# Altium PCB 1_ir-tara-f.PcbDoc (part 1 of 8)
Units mm, origin at the board's own origin, x right, y up, seen from the top; angles counter-clockwise.
Board outline 151 x 86.38 mm, 2 copper layers (Top Layer, Bottom Layer); 728 components, 20 nets, 2100 pads, 0 vias.
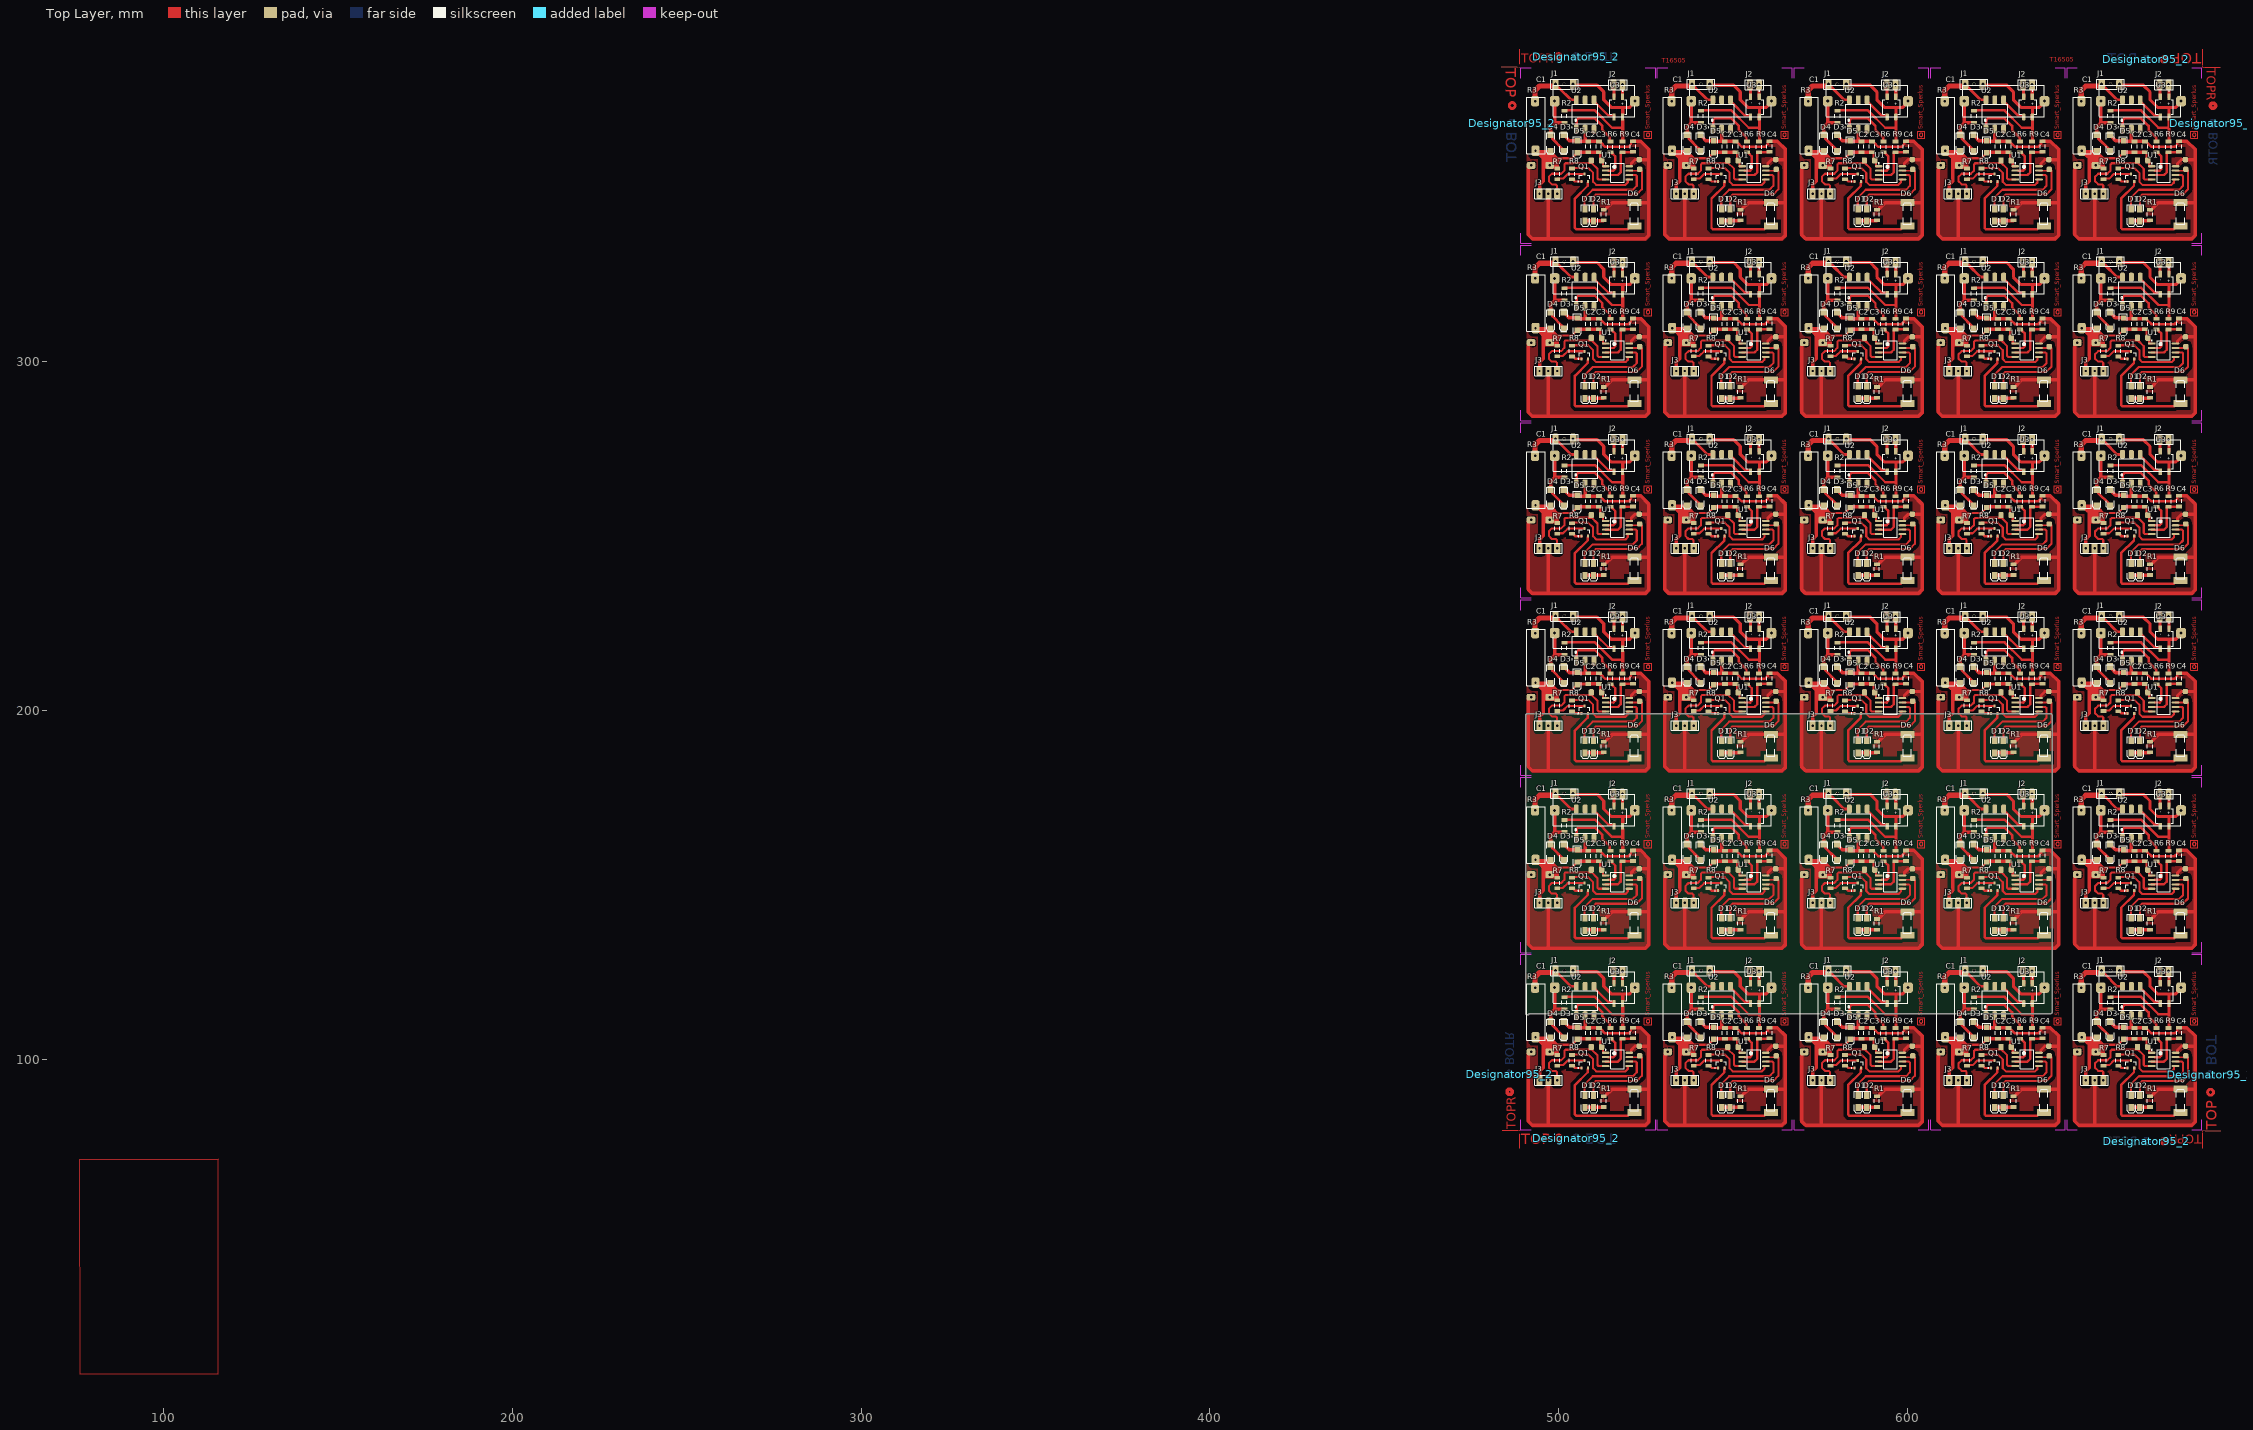
[diagram p0: Top Layer view]
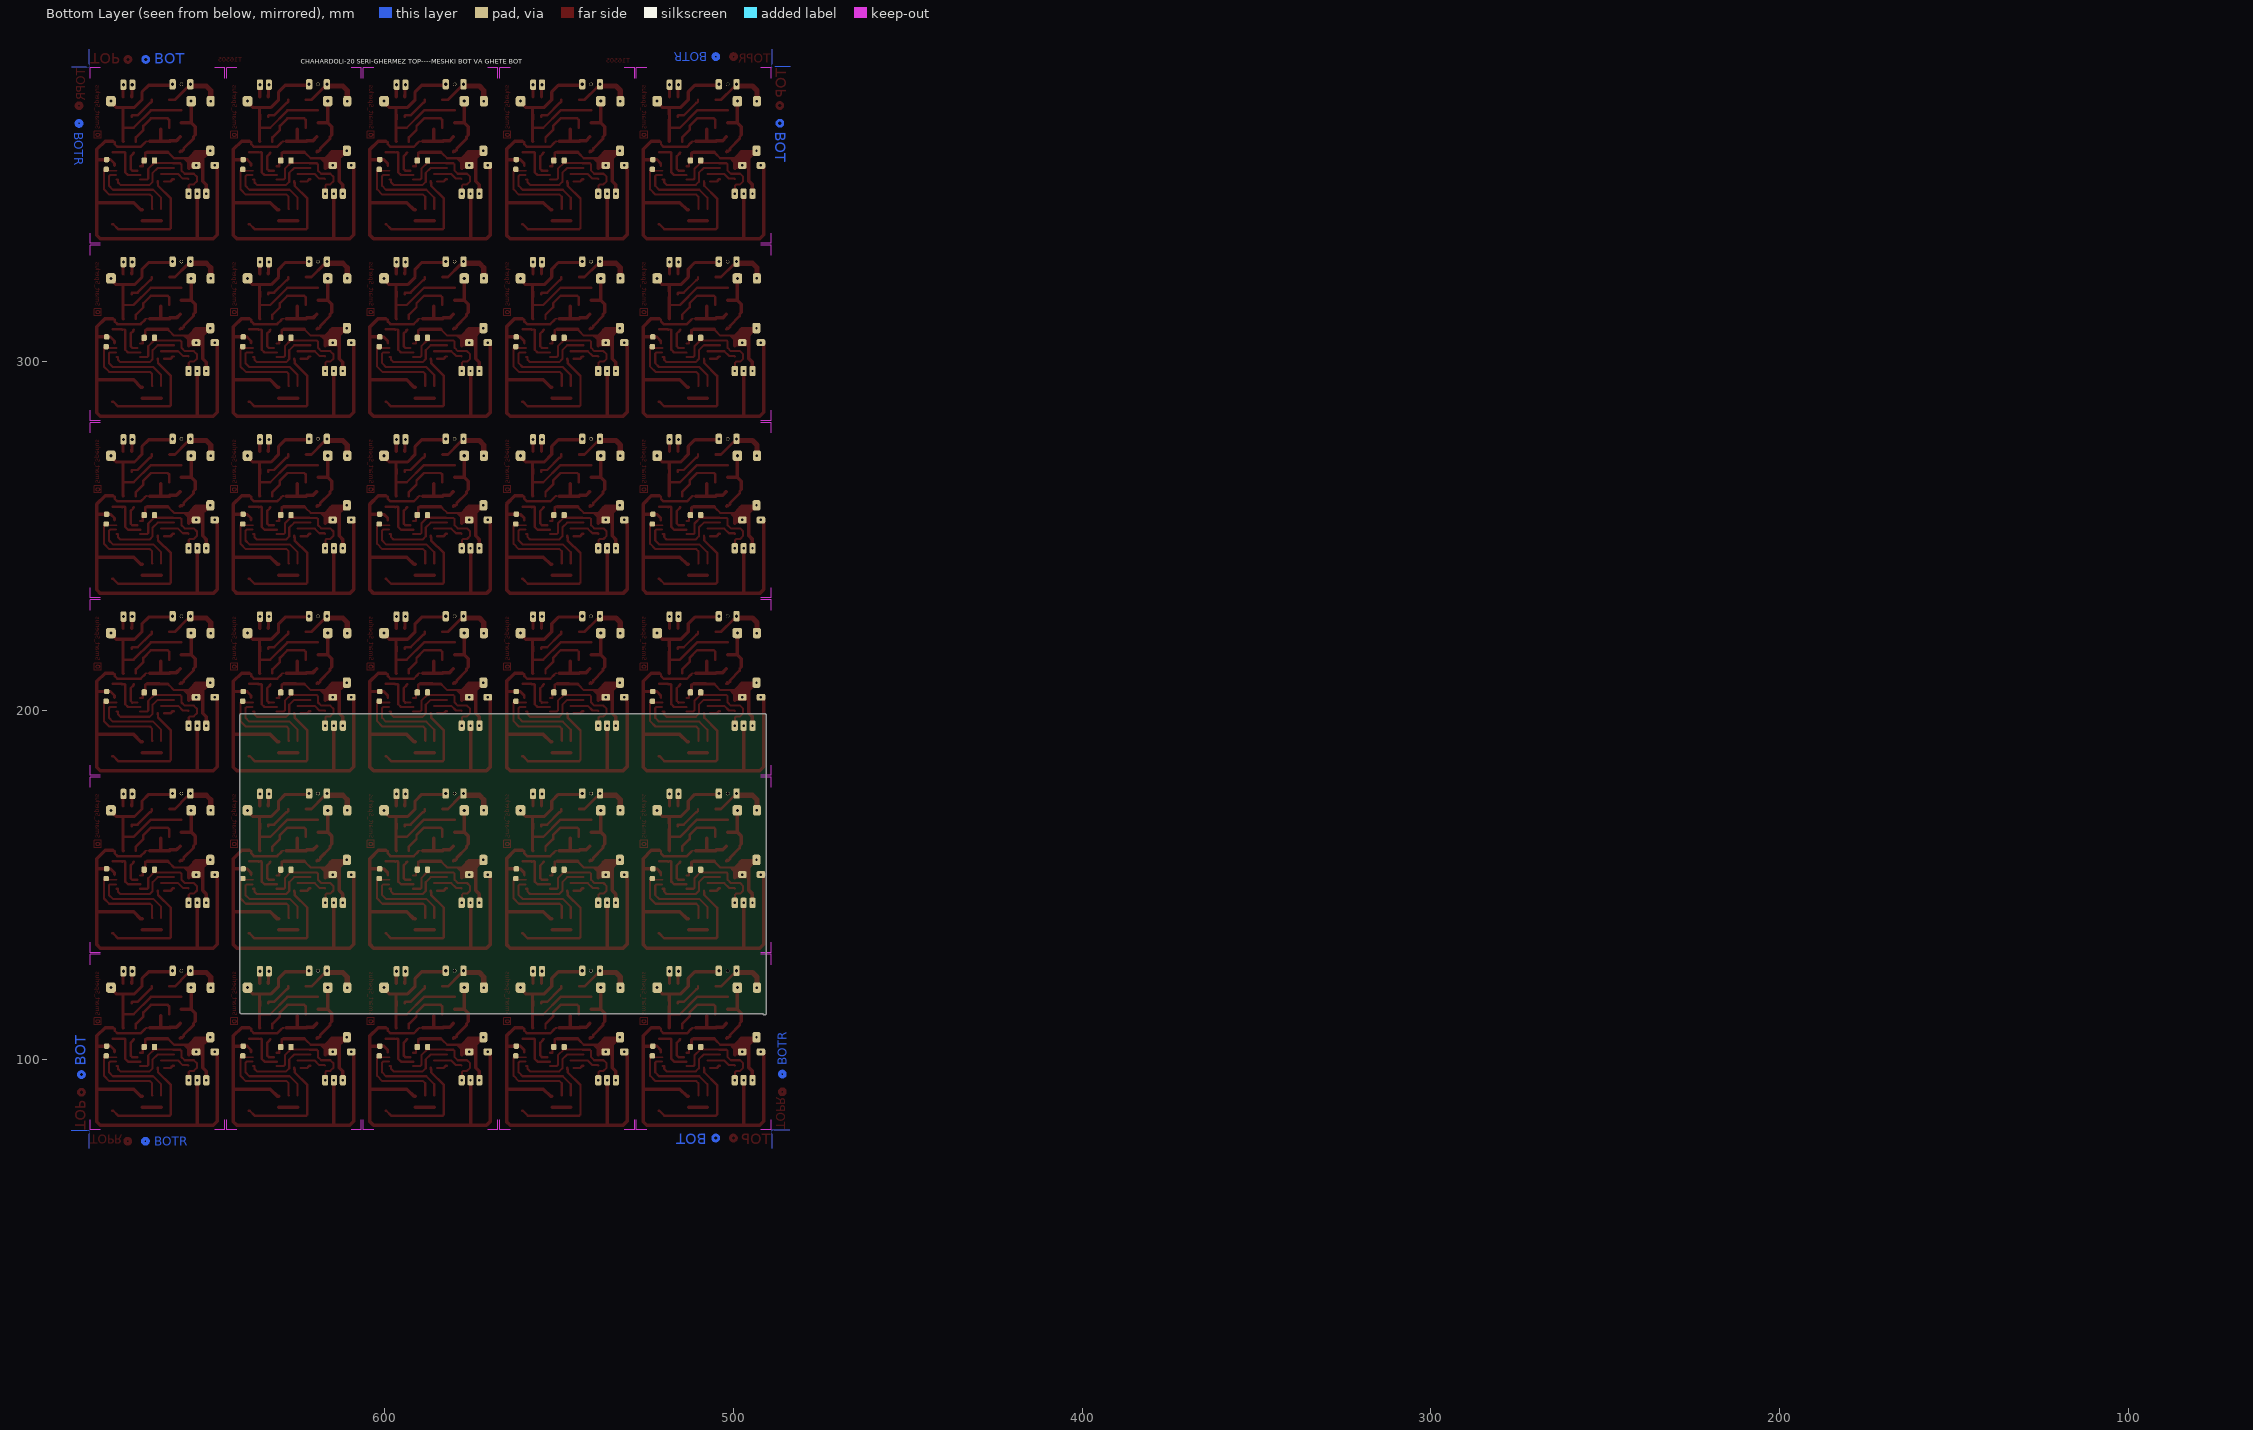
[diagram p1: Bottom Layer view, seen from below]

## Layer stack, top to bottom
Top Layer: signal copper 0.0356
Dielectric: dielectric 0.32, FR-4, Dk 4.8
Bottom Layer: signal copper 0.0356

## Board outline
490.528,113.26 490.528,198.641 cw(c491.028,198.641) 491.028,199.142 641.028,199.142 cw(c641.028,198.641) 641.528,198.641 641.528,113.641 cw(c641.028,113.641) 641.028,113.141 491.514,113.141 cw(c491.028,113.26)

## Design rules (kind name [scope] priority, off if disabled: settings)
Clearance Clearance_1 [InPolygon] p1: gap=1
Clearance [All] p2: gap=0.6
ComponentClearance [All] p1: gap=0.254 collisioncheckmode=3 verticalgap=0.254
PolygonConnect [All] p1: connectstyle=Relief reliefconductorwidth=0.254 reliefentries=4 polygonreliefangle="90 Angle"
RoutingLayers [All] p1: top layer_v5=FALSE bottom layer_v5=TRUE
RoutingVias [All] p1: holewidth=0.711 width=2.5 viastyle="Through Hole" minholewidth=0.711 minwidth=1.27 maxholewidth=0.711 maxwidth=2
SolderMaskExpansion [All] p1: expansion=0.102
TestPointUsage FabricationTestPointUsage [All] p1: valid=0 allowmultiple=FALSE
Testpoint FabricationTestpoint [All] p1: side=3 testpointundercomponent=TRUE minsize=1.016 maxsize=2.54 preferedsize=1.524 minholesize=0 maxholesize=1.016 preferedholesize=0.813 testpointgrid=0.025 style=297 order=0123456789
Width [All] p1: maxlimit=3 minlimit=0.5 preferedwidth=1
17 further rules are at their usual default settings.

## Classes and differential pairs
component class ir-kh: C1 C2 C3 C4 D1 D2 D3 D4 D5 D6 D21 D22 D23 J1 J2 J3 J5 J8 JP? P5 P7 Q1 R1 R2 R6 R7 R8 R9 R22 U1 U2 U3 U17

## Components (designator, comment, footprint, x,y, rotation, side; value= is the part's Value field where it differs from the comment)
C1 "1uf 400v" "1uf 400v" 600.756,379.353 r180 top
C1 "1uf 400v" "1uf 400v" 639.911,379.353 r180 top
C1 "1uf 400v" "1uf 400v" 561.601,379.353 r180 top
C1 "1uf 400v" "1uf 400v" 522.447,379.353 r180 top
C1 "1uf 400v" "1uf 400v" 679.065,379.353 r180 top
C1 "1uf 400v" "1uf 400v" 600.756,328.514 r180 top
C1 "1uf 400v" "1uf 400v" 639.911,328.514 r180 top
C1 "1uf 400v" "1uf 400v" 561.601,328.514 r180 top
C1 "1uf 400v" "1uf 400v" 522.447,328.514 r180 top
C1 "1uf 400v" "1uf 400v" 679.065,328.514 r180 top
C1 "1uf 400v" "1uf 400v" 600.756,277.676 r180 top
C1 "1uf 400v" "1uf 400v" 639.911,277.676 r180 top
C1 "1uf 400v" "1uf 400v" 561.601,277.676 r180 top
C1 "1uf 400v" "1uf 400v" 522.447,277.676 r180 top
C1 "1uf 400v" "1uf 400v" 679.065,277.676 r180 top
C1 "1uf 400v" "1uf 400v" 600.756,125.16 r180 top
C1 "1uf 400v" "1uf 400v" 639.911,125.16 r180 top
C1 "1uf 400v" "1uf 400v" 561.601,125.16 r180 top
C1 "1uf 400v" "1uf 400v" 522.447,125.16 r180 top
C1 "1uf 400v" "1uf 400v" 679.065,125.16 r180 top
C1 "1uf 400v" "1uf 400v" 600.756,226.837 r180 top
C1 "1uf 400v" "1uf 400v" 639.911,226.837 r180 top
C1 "1uf 400v" "1uf 400v" 561.601,226.837 r180 top
C1 "1uf 400v" "1uf 400v" 522.447,226.837 r180 top
C1 "1uf 400v" "1uf 400v" 679.065,226.837 r180 top
C1 "1uf 400v" "1uf 400v" 679.065,175.998 r180 top
C1 "1uf 400v" "1uf 400v" 522.447,175.998 r180 top
C1 "1uf 400v" "1uf 400v" 561.601,175.998 r180 top
C1 "1uf 400v" "1uf 400v" 639.911,175.998 r180 top
C1 "1uf 400v" "1uf 400v" 600.756,175.998 r180 top
C2 "=Value" "CAP 1206"#1 586.786,361.7 r90 top
C2 "=Value" "CAP 1206"#1 625.941,361.7 r90 top
C2 "=Value" "CAP 1206"#1 547.631,361.7 r90 top
C2 "=Value" "CAP 1206"#1 508.477,361.7 r90 top
C2 "=Value" "CAP 1206"#1 665.095,361.7 r90 top
C2 "=Value" "CAP 1206"#1 586.786,310.861 r90 top
C2 "=Value" "CAP 1206"#1 625.941,310.861 r90 top
C2 "=Value" "CAP 1206"#1 547.631,310.861 r90 top
C2 "=Value" "CAP 1206"#1 508.477,310.861 r90 top
C2 "=Value" "CAP 1206"#1 665.095,310.861 r90 top
C2 "=Value" "CAP 1206"#1 586.786,260.023 r90 top
C2 "=Value" "CAP 1206"#1 625.941,260.023 r90 top
C2 "=Value" "CAP 1206"#1 547.631,260.023 r90 top
C2 "=Value" "CAP 1206"#1 508.477,260.023 r90 top
C2 "=Value" "CAP 1206"#1 665.095,260.023 r90 top
C2 "=Value" "CAP 1206"#1 586.786,107.507 r90 top
C2 "=Value" "CAP 1206"#1 625.941,107.507 r90 top
C2 "=Value" "CAP 1206"#1 547.631,107.507 r90 top
C2 "=Value" "CAP 1206"#1 508.477,107.507 r90 top
C2 "=Value" "CAP 1206"#1 665.095,107.507 r90 top
C2 "=Value" "CAP 1206"#1 586.786,209.184 r90 top
C2 "=Value" "CAP 1206"#1 625.941,209.184 r90 top
C2 "=Value" "CAP 1206"#1 547.631,209.184 r90 top
C2 "=Value" "CAP 1206"#1 508.477,209.184 r90 top
C2 "=Value" "CAP 1206"#1 665.095,209.184 r90 top
C2 "=Value" "CAP 1206"#1 665.095,158.345 r90 top
C2 "=Value" "CAP 1206"#1 508.477,158.345 r90 top
C2 "=Value" "CAP 1206"#1 547.631,158.345 r90 top
C2 "=Value" "CAP 1206"#1 625.941,158.345 r90 top
C2 "=Value" "CAP 1206"#1 586.786,158.345 r90 top
C3 "=Value" "CAP 1206"#1 589.834,361.7 r90 top
C3 "=Value" "CAP 1206"#1 628.989,361.7 r90 top
C3 "=Value" "CAP 1206"#1 550.679,361.7 r90 top
C3 "=Value" "CAP 1206"#1 511.525,361.7 r90 top
C3 "=Value" "CAP 1206"#1 668.143,361.7 r90 top
C3 "=Value" "CAP 1206"#1 589.834,310.861 r90 top
C3 "=Value" "CAP 1206"#1 628.989,310.861 r90 top
C3 "=Value" "CAP 1206"#1 550.679,310.861 r90 top
C3 "=Value" "CAP 1206"#1 511.525,310.861 r90 top
C3 "=Value" "CAP 1206"#1 668.143,310.861 r90 top
C3 "=Value" "CAP 1206"#1 589.834,260.023 r90 top
C3 "=Value" "CAP 1206"#1 628.989,260.023 r90 top
C3 "=Value" "CAP 1206"#1 550.679,260.023 r90 top
C3 "=Value" "CAP 1206"#1 511.525,260.023 r90 top
C3 "=Value" "CAP 1206"#1 668.143,260.023 r90 top
C3 "=Value" "CAP 1206"#1 589.834,107.507 r90 top
C3 "=Value" "CAP 1206"#1 628.989,107.507 r90 top
C3 "=Value" "CAP 1206"#1 550.679,107.507 r90 top
C3 "=Value" "CAP 1206"#1 511.525,107.507 r90 top
C3 "=Value" "CAP 1206"#1 668.143,107.507 r90 top
C3 "=Value" "CAP 1206"#1 589.834,209.184 r90 top
C3 "=Value" "CAP 1206"#1 628.989,209.184 r90 top
C3 "=Value" "CAP 1206"#1 550.679,209.184 r90 top
C3 "=Value" "CAP 1206"#1 511.525,209.184 r90 top
C3 "=Value" "CAP 1206"#1 668.143,209.184 r90 top
C3 "=Value" "CAP 1206"#1 668.143,158.345 r90 top
C3 "=Value" "CAP 1206"#1 511.525,158.345 r90 top
C3 "=Value" "CAP 1206"#1 550.679,158.345 r90 top
C3 "=Value" "CAP 1206"#1 628.989,158.345 r90 top
C3 "=Value" "CAP 1206"#1 589.834,158.345 r90 top
C4 "=Value" "CAP 1206"#2 599.613,361.827 r270 top
C4 "=Value" "CAP 1206"#2 638.768,361.827 r270 top
C4 "=Value" "CAP 1206"#2 560.458,361.827 r270 top
C4 "=Value" "CAP 1206"#2 521.304,361.827 r270 top
C4 "=Value" "CAP 1206"#2 677.922,361.827 r270 top
C4 "=Value" "CAP 1206"#2 599.613,310.988 r270 top
C4 "=Value" "CAP 1206"#2 638.768,310.988 r270 top
C4 "=Value" "CAP 1206"#2 560.458,310.988 r270 top
C4 "=Value" "CAP 1206"#2 521.304,310.988 r270 top
C4 "=Value" "CAP 1206"#2 677.922,310.988 r270 top
C4 "=Value" "CAP 1206"#2 599.613,260.15 r270 top
C4 "=Value" "CAP 1206"#2 638.768,260.15 r270 top
C4 "=Value" "CAP 1206"#2 560.458,260.15 r270 top
C4 "=Value" "CAP 1206"#2 521.304,260.15 r270 top
C4 "=Value" "CAP 1206"#2 677.922,260.15 r270 top
C4 "=Value" "CAP 1206"#2 599.613,107.634 r270 top
C4 "=Value" "CAP 1206"#2 638.768,107.634 r270 top
C4 "=Value" "CAP 1206"#2 560.458,107.634 r270 top
C4 "=Value" "CAP 1206"#2 521.304,107.634 r270 top
C4 "=Value" "CAP 1206"#2 677.922,107.634 r270 top
C4 "=Value" "CAP 1206"#2 599.613,209.311 r270 top
C4 "=Value" "CAP 1206"#2 638.768,209.311 r270 top
C4 "=Value" "CAP 1206"#2 560.458,209.311 r270 top
C4 "=Value" "CAP 1206"#2 521.304,209.311 r270 top
C4 "=Value" "CAP 1206"#2 677.922,209.311 r270 top
C4 "=Value" "CAP 1206"#2 677.922,158.472 r270 top
C4 "=Value" "CAP 1206"#2 521.304,158.472 r270 top
C4 "=Value" "CAP 1206"#2 560.458,158.472 r270 top
C4 "=Value" "CAP 1206"#2 638.768,158.472 r270 top
C4 "=Value" "CAP 1206"#2 599.613,158.472 r270 top
D1 "LED2" 3.2X1.6X1.1#1 585.897,342.142 r270 top
D1 "LED2" 3.2X1.6X1.1#1 625.052,342.142 r270 top
D1 "LED2" 3.2X1.6X1.1#1 546.742,342.142 r270 top
D1 "LED2" 3.2X1.6X1.1#1 507.588,342.142 r270 top
D1 "LED2" 3.2X1.6X1.1#1 664.206,342.142 r270 top
D1 "LED2" 3.2X1.6X1.1#1 585.897,291.303 r270 top
D1 "LED2" 3.2X1.6X1.1#1 625.052,291.303 r270 top
D1 "LED2" 3.2X1.6X1.1#1 546.742,291.303 r270 top
D1 "LED2" 3.2X1.6X1.1#1 507.588,291.303 r270 top
D1 "LED2" 3.2X1.6X1.1#1 664.206,291.303 r270 top
D1 "LED2" 3.2X1.6X1.1#1 585.897,240.465 r270 top
D1 "LED2" 3.2X1.6X1.1#1 625.052,240.465 r270 top
D1 "LED2" 3.2X1.6X1.1#1 546.742,240.465 r270 top
D1 "LED2" 3.2X1.6X1.1#1 507.588,240.465 r270 top
D1 "LED2" 3.2X1.6X1.1#1 664.206,240.465 r270 top
D1 "LED2" 3.2X1.6X1.1#1 585.897,87.949 r270 top
D1 "LED2" 3.2X1.6X1.1#1 625.052,87.949 r270 top
D1 "LED2" 3.2X1.6X1.1#1 546.742,87.949 r270 top
D1 "LED2" 3.2X1.6X1.1#1 507.588,87.949 r270 top
D1 "LED2" 3.2X1.6X1.1#1 664.206,87.949 r270 top
D1 "LED2" 3.2X1.6X1.1#1 585.897,189.626 r270 top
D1 "LED2" 3.2X1.6X1.1#1 625.052,189.626 r270 top
D1 "LED2" 3.2X1.6X1.1#1 546.742,189.626 r270 top
D1 "LED2" 3.2X1.6X1.1#1 507.588,189.626 r270 top
D1 "LED2" 3.2X1.6X1.1#1 664.206,189.626 r270 top
D1 "LED2" 3.2X1.6X1.1#1 664.206,138.787 r270 top
D1 "LED2" 3.2X1.6X1.1#1 507.588,138.787 r270 top
D1 "LED2" 3.2X1.6X1.1#1 546.742,138.787 r270 top
D1 "LED2" 3.2X1.6X1.1#1 625.052,138.787 r270 top
D1 "LED2" 3.2X1.6X1.1#1 585.897,138.787 r270 top
D2 "LED2" 3.2X1.6X1.1#1 588.31,342.142 r270 top
D2 "LED2" 3.2X1.6X1.1#1 627.465,342.142 r270 top
D2 "LED2" 3.2X1.6X1.1#1 549.155,342.142 r270 top
D2 "LED2" 3.2X1.6X1.1#1 510.001,342.142 r270 top
D2 "LED2" 3.2X1.6X1.1#1 666.619,342.142 r270 top
D2 "LED2" 3.2X1.6X1.1#1 588.31,291.303 r270 top
D2 "LED2" 3.2X1.6X1.1#1 627.465,291.303 r270 top
D2 "LED2" 3.2X1.6X1.1#1 549.155,291.303 r270 top
D2 "LED2" 3.2X1.6X1.1#1 510.001,291.303 r270 top
D2 "LED2" 3.2X1.6X1.1#1 666.619,291.303 r270 top
D2 "LED2" 3.2X1.6X1.1#1 588.31,240.465 r270 top
D2 "LED2" 3.2X1.6X1.1#1 627.465,240.465 r270 top
D2 "LED2" 3.2X1.6X1.1#1 549.155,240.465 r270 top
D2 "LED2" 3.2X1.6X1.1#1 510.001,240.465 r270 top
D2 "LED2" 3.2X1.6X1.1#1 666.619,240.465 r270 top
D2 "LED2" 3.2X1.6X1.1#1 588.31,87.949 r270 top
D2 "LED2" 3.2X1.6X1.1#1 627.465,87.949 r270 top
D2 "LED2" 3.2X1.6X1.1#1 549.155,87.949 r270 top
D2 "LED2" 3.2X1.6X1.1#1 510.001,87.949 r270 top
D2 "LED2" 3.2X1.6X1.1#1 666.619,87.949 r270 top
D2 "LED2" 3.2X1.6X1.1#1 588.31,189.626 r270 top
D2 "LED2" 3.2X1.6X1.1#1 627.465,189.626 r270 top
D2 "LED2" 3.2X1.6X1.1#1 549.155,189.626 r270 top
D2 "LED2" 3.2X1.6X1.1#1 510.001,189.626 r270 top
D2 "LED2" 3.2X1.6X1.1#1 666.619,189.626 r270 top
D2 "LED2" 3.2X1.6X1.1#1 666.619,138.787 r270 top
D2 "LED2" 3.2X1.6X1.1#1 510.001,138.787 r270 top
D2 "LED2" 3.2X1.6X1.1#1 549.155,138.787 r270 top
D2 "LED2" 3.2X1.6X1.1#1 627.465,138.787 r270 top
D2 "LED2" 3.2X1.6X1.1#1 588.31,138.787 r270 top
D3 "D Tunnel1" 3.2X1.6X1.1#2 579.801,362.843 r270 top
D3 "D Tunnel1" 3.2X1.6X1.1#2 618.956,362.843 r270 top
D3 "D Tunnel1" 3.2X1.6X1.1#2 540.646,362.843 r270 top
D3 "D Tunnel1" 3.2X1.6X1.1#2 501.492,362.843 r270 top
D3 "D Tunnel1" 3.2X1.6X1.1#2 658.11,362.843 r270 top
D3 "D Tunnel1" 3.2X1.6X1.1#2 579.801,312.004 r270 top
D3 "D Tunnel1" 3.2X1.6X1.1#2 618.956,312.004 r270 top
D3 "D Tunnel1" 3.2X1.6X1.1#2 540.646,312.004 r270 top
D3 "D Tunnel1" 3.2X1.6X1.1#2 501.492,312.004 r270 top
D3 "D Tunnel1" 3.2X1.6X1.1#2 658.11,312.004 r270 top
D3 "D Tunnel1" 3.2X1.6X1.1#2 579.801,261.166 r270 top
D3 "D Tunnel1" 3.2X1.6X1.1#2 618.956,261.166 r270 top
D3 "D Tunnel1" 3.2X1.6X1.1#2 540.646,261.166 r270 top
D3 "D Tunnel1" 3.2X1.6X1.1#2 501.492,261.166 r270 top
D3 "D Tunnel1" 3.2X1.6X1.1#2 658.11,261.166 r270 top
D3 "D Tunnel1" 3.2X1.6X1.1#2 579.801,108.65 r270 top
D3 "D Tunnel1" 3.2X1.6X1.1#2 618.956,108.65 r270 top
D3 "D Tunnel1" 3.2X1.6X1.1#2 540.646,108.65 r270 top
D3 "D Tunnel1" 3.2X1.6X1.1#2 501.492,108.65 r270 top
D3 "D Tunnel1" 3.2X1.6X1.1#2 658.11,108.65 r270 top
D3 "D Tunnel1" 3.2X1.6X1.1#2 579.801,210.327 r270 top
D3 "D Tunnel1" 3.2X1.6X1.1#2 618.956,210.327 r270 top
D3 "D Tunnel1" 3.2X1.6X1.1#2 540.646,210.327 r270 top
D3 "D Tunnel1" 3.2X1.6X1.1#2 501.492,210.327 r270 top
D3 "D Tunnel1" 3.2X1.6X1.1#2 658.11,210.327 r270 top
D3 "D Tunnel1" 3.2X1.6X1.1#2 658.11,159.488 r270 top
D3 "D Tunnel1" 3.2X1.6X1.1#2 501.492,159.488 r270 top
D3 "D Tunnel1" 3.2X1.6X1.1#2 540.646,159.488 r270 top
D3 "D Tunnel1" 3.2X1.6X1.1#2 618.956,159.488 r270 top
D3 "D Tunnel1" 3.2X1.6X1.1#2 579.801,159.488 r270 top
D4 "D Tunnel1" 3.2X1.6X1.1#2 575.991,362.843 r270 top
D4 "D Tunnel1" 3.2X1.6X1.1#2 615.146,362.843 r270 top
D4 "D Tunnel1" 3.2X1.6X1.1#2 536.836,362.843 r270 top
D4 "D Tunnel1" 3.2X1.6X1.1#2 497.682,362.843 r270 top
D4 "D Tunnel1" 3.2X1.6X1.1#2 654.3,362.843 r270 top
D4 "D Tunnel1" 3.2X1.6X1.1#2 575.991,312.004 r270 top
D4 "D Tunnel1" 3.2X1.6X1.1#2 615.146,312.004 r270 top
D4 "D Tunnel1" 3.2X1.6X1.1#2 536.836,312.004 r270 top
D4 "D Tunnel1" 3.2X1.6X1.1#2 497.682,312.004 r270 top
D4 "D Tunnel1" 3.2X1.6X1.1#2 654.3,312.004 r270 top
D4 "D Tunnel1" 3.2X1.6X1.1#2 575.991,261.166 r270 top
D4 "D Tunnel1" 3.2X1.6X1.1#2 615.146,261.166 r270 top
D4 "D Tunnel1" 3.2X1.6X1.1#2 536.836,261.166 r270 top
D4 "D Tunnel1" 3.2X1.6X1.1#2 497.682,261.166 r270 top
D4 "D Tunnel1" 3.2X1.6X1.1#2 654.3,261.166 r270 top
D4 "D Tunnel1" 3.2X1.6X1.1#2 575.991,108.65 r270 top
D4 "D Tunnel1" 3.2X1.6X1.1#2 615.146,108.65 r270 top
D4 "D Tunnel1" 3.2X1.6X1.1#2 536.836,108.65 r270 top
D4 "D Tunnel1" 3.2X1.6X1.1#2 497.682,108.65 r270 top
D4 "D Tunnel1" 3.2X1.6X1.1#2 654.3,108.65 r270 top
D4 "D Tunnel1" 3.2X1.6X1.1#2 575.991,210.327 r270 top
D4 "D Tunnel1" 3.2X1.6X1.1#2 615.146,210.327 r270 top
D4 "D Tunnel1" 3.2X1.6X1.1#2 536.836,210.327 r270 top
D4 "D Tunnel1" 3.2X1.6X1.1#2 497.682,210.327 r270 top
D4 "D Tunnel1" 3.2X1.6X1.1#2 654.3,210.327 r270 top
D4 "D Tunnel1" 3.2X1.6X1.1#2 654.3,159.488 r270 top
D4 "D Tunnel1" 3.2X1.6X1.1#2 497.682,159.488 r270 top
D4 "D Tunnel1" 3.2X1.6X1.1#2 536.836,159.488 r270 top
D4 "D Tunnel1" 3.2X1.6X1.1#2 615.146,159.488 r270 top
D4 "D Tunnel1" 3.2X1.6X1.1#2 575.991,159.488 r270 top
D5 "D Tunnel1" 3.2X1.6X1.1#3 583.611,361.7 r270 top
D5 "D Tunnel1" 3.2X1.6X1.1#3 622.766,361.7 r270 top
D5 "D Tunnel1" 3.2X1.6X1.1#3 544.456,361.7 r270 top
D5 "D Tunnel1" 3.2X1.6X1.1#3 505.302,361.7 r270 top
D5 "D Tunnel1" 3.2X1.6X1.1#3 661.92,361.7 r270 top
D5 "D Tunnel1" 3.2X1.6X1.1#3 583.611,310.861 r270 top
D5 "D Tunnel1" 3.2X1.6X1.1#3 622.766,310.861 r270 top
D5 "D Tunnel1" 3.2X1.6X1.1#3 544.456,310.861 r270 top
D5 "D Tunnel1" 3.2X1.6X1.1#3 505.302,310.861 r270 top
D5 "D Tunnel1" 3.2X1.6X1.1#3 661.92,310.861 r270 top
D5 "D Tunnel1" 3.2X1.6X1.1#3 583.611,260.023 r270 top
D5 "D Tunnel1" 3.2X1.6X1.1#3 622.766,260.023 r270 top
D5 "D Tunnel1" 3.2X1.6X1.1#3 544.456,260.023 r270 top
D5 "D Tunnel1" 3.2X1.6X1.1#3 505.302,260.023 r270 top
D5 "D Tunnel1" 3.2X1.6X1.1#3 661.92,260.023 r270 top
D5 "D Tunnel1" 3.2X1.6X1.1#3 583.611,107.507 r270 top
D5 "D Tunnel1" 3.2X1.6X1.1#3 622.766,107.507 r270 top
D5 "D Tunnel1" 3.2X1.6X1.1#3 544.456,107.507 r270 top
D5 "D Tunnel1" 3.2X1.6X1.1#3 505.302,107.507 r270 top
D5 "D Tunnel1" 3.2X1.6X1.1#3 661.92,107.507 r270 top
D5 "D Tunnel1" 3.2X1.6X1.1#3 583.611,209.184 r270 top
D5 "D Tunnel1" 3.2X1.6X1.1#3 622.766,209.184 r270 top
D5 "D Tunnel1" 3.2X1.6X1.1#3 544.456,209.184 r270 top
D5 "D Tunnel1" 3.2X1.6X1.1#3 505.302,209.184 r270 top
D5 "D Tunnel1" 3.2X1.6X1.1#3 661.92,209.184 r270 top
D5 "D Tunnel1" 3.2X1.6X1.1#3 661.92,158.345 r270 top
D5 "D Tunnel1" 3.2X1.6X1.1#3 505.302,158.345 r270 top
D5 "D Tunnel1" 3.2X1.6X1.1#3 544.456,158.345 r270 top
D5 "D Tunnel1" 3.2X1.6X1.1#3 622.766,158.345 r270 top
D5 "D Tunnel1" 3.2X1.6X1.1#3 583.611,158.345 r270 top
D6 "LED2" 3.2X1.6X1.1#4 599.994,342.396 r90 top
D6 "LED2" 3.2X1.6X1.1#4 639.149,342.396 r90 top
D6 "LED2" 3.2X1.6X1.1#4 560.839,342.396 r90 top
D6 "LED2" 3.2X1.6X1.1#4 521.685,342.396 r90 top
D6 "LED2" 3.2X1.6X1.1#4 678.303,342.396 r90 top
D6 "LED2" 3.2X1.6X1.1#4 599.994,291.557 r90 top
D6 "LED2" 3.2X1.6X1.1#4 639.149,291.557 r90 top
D6 "LED2" 3.2X1.6X1.1#4 560.839,291.557 r90 top
D6 "LED2" 3.2X1.6X1.1#4 521.685,291.557 r90 top
D6 "LED2" 3.2X1.6X1.1#4 678.303,291.557 r90 top
D6 "LED2" 3.2X1.6X1.1#4 599.994,240.719 r90 top
D6 "LED2" 3.2X1.6X1.1#4 639.149,240.719 r90 top
D6 "LED2" 3.2X1.6X1.1#4 560.839,240.719 r90 top
D6 "LED2" 3.2X1.6X1.1#4 521.685,240.719 r90 top
D6 "LED2" 3.2X1.6X1.1#4 678.303,240.719 r90 top
D6 "LED2" 3.2X1.6X1.1#4 599.994,88.203 r90 top
D6 "LED2" 3.2X1.6X1.1#4 639.149,88.203 r90 top
D6 "LED2" 3.2X1.6X1.1#4 560.839,88.203 r90 top
D6 "LED2" 3.2X1.6X1.1#4 521.685,88.203 r90 top
D6 "LED2" 3.2X1.6X1.1#4 678.303,88.203 r90 top
D6 "LED2" 3.2X1.6X1.1#4 599.994,189.88 r90 top
D6 "LED2" 3.2X1.6X1.1#4 639.149,189.88 r90 top
D6 "LED2" 3.2X1.6X1.1#4 560.839,189.88 r90 top
D6 "LED2" 3.2X1.6X1.1#4 521.685,189.88 r90 top
D6 "LED2" 3.2X1.6X1.1#4 678.303,189.88 r90 top
D6 "LED2" 3.2X1.6X1.1#4 678.303,139.041 r90 top
D6 "LED2" 3.2X1.6X1.1#4 521.685,139.041 r90 top
D6 "LED2" 3.2X1.6X1.1#4 560.839,139.041 r90 top
D6 "LED2" 3.2X1.6X1.1#4 639.149,139.041 r90 top
D6 "LED2" 3.2X1.6X1.1#4 599.994,139.041 r90 top
Designator95_2 "Comment" PAD 505.012,387.549 r270 top
Designator95_2 "Comment" PAD 486.667,368.438 r180 top
Designator95_2 "Comment" PAD 687.621,368.388 r180 top
Designator95_2 "Comment" PAD 668.51,386.733 r90 top
Designator95_2 "Comment" PAD 668.574,76.553 r90 top
Designator95_2 "Comment" PAD 686.919,95.664 r0 top
Designator95_2 "Comment" PAD 485.943,95.805 r0 top
Designator95_2 "Comment" PAD 505.054,77.46 r270 top
J1 "Header3X1" "HEADER 3X1"#1 577.388,379.607 r0 top
J1 "Header3X1" "HEADER 3X1"#1 616.543,379.607 r0 top
J1 "Header3X1" "HEADER 3X1"#1 538.233,379.607 r0 top
J1 "Header3X1" "HEADER 3X1"#1 499.079,379.607 r0 top
J1 "Header3X1" "HEADER 3X1"#1 655.697,379.607 r0 top
J1 "Header3X1" "HEADER 3X1"#1 577.388,328.768 r0 top
J1 "Header3X1" "HEADER 3X1"#1 616.543,328.768 r0 top
J1 "Header3X1" "HEADER 3X1"#1 538.233,328.768 r0 top
J1 "Header3X1" "HEADER 3X1"#1 499.079,328.768 r0 top
J1 "Header3X1" "HEADER 3X1"#1 655.697,328.768 r0 top
J1 "Header3X1" "HEADER 3X1"#1 577.388,277.93 r0 top
J1 "Header3X1" "HEADER 3X1"#1 616.543,277.93 r0 top
J1 "Header3X1" "HEADER 3X1"#1 538.233,277.93 r0 top
J1 "Header3X1" "HEADER 3X1"#1 499.079,277.93 r0 top
J1 "Header3X1" "HEADER 3X1"#1 655.697,277.93 r0 top
J1 "Header3X1" "HEADER 3X1"#1 577.388,125.414 r0 top
J1 "Header3X1" "HEADER 3X1"#1 616.543,125.414 r0 top
J1 "Header3X1" "HEADER 3X1"#1 538.233,125.414 r0 top
J1 "Header3X1" "HEADER 3X1"#1 499.079,125.414 r0 top
J1 "Header3X1" "HEADER 3X1"#1 655.697,125.414 r0 top
J1 "Header3X1" "HEADER 3X1"#1 577.388,227.091 r0 top
J1 "Header3X1" "HEADER 3X1"#1 616.543,227.091 r0 top
J1 "Header3X1" "HEADER 3X1"#1 538.233,227.091 r0 top
J1 "Header3X1" "HEADER 3X1"#1 499.079,227.091 r0 top
J1 "Header3X1" "HEADER 3X1"#1 655.697,227.091 r0 top
J1 "Header3X1" "HEADER 3X1"#1 655.697,176.252 r0 top
J1 "Header3X1" "HEADER 3X1"#1 499.079,176.252 r0 top
J1 "Header3X1" "HEADER 3X1"#1 538.233,176.252 r0 top
J1 "Header3X1" "HEADER 3X1"#1 616.543,176.252 r0 top
J1 "Header3X1" "HEADER 3X1"#1 577.388,176.252 r0 top
J2 "Header2X1" "Header 2X1" 595.295,379.48 r0 top
J2 "Header2X1" "Header 2X1" 634.45,379.48 r0 top
J2 "Header2X1" "Header 2X1" 556.14,379.48 r0 top
J2 "Header2X1" "Header 2X1" 516.986,379.48 r0 top
J2 "Header2X1" "Header 2X1" 673.604,379.48 r0 top
J2 "Header2X1" "Header 2X1" 595.295,328.641 r0 top
J2 "Header2X1" "Header 2X1" 634.45,328.641 r0 top
J2 "Header2X1" "Header 2X1" 556.14,328.641 r0 top
J2 "Header2X1" "Header 2X1" 516.986,328.641 r0 top
J2 "Header2X1" "Header 2X1" 673.604,328.641 r0 top
J2 "Header2X1" "Header 2X1" 595.295,277.803 r0 top
J2 "Header2X1" "Header 2X1" 634.45,277.803 r0 top
J2 "Header2X1" "Header 2X1" 556.14,277.803 r0 top
J2 "Header2X1" "Header 2X1" 516.986,277.803 r0 top
J2 "Header2X1" "Header 2X1" 673.604,277.803 r0 top
J2 "Header2X1" "Header 2X1" 595.295,125.287 r0 top
J2 "Header2X1" "Header 2X1" 634.45,125.287 r0 top
J2 "Header2X1" "Header 2X1" 556.14,125.287 r0 top
J2 "Header2X1" "Header 2X1" 516.986,125.287 r0 top
J2 "Header2X1" "Header 2X1" 673.604,125.287 r0 top
J2 "Header2X1" "Header 2X1" 595.295,226.964 r0 top
J2 "Header2X1" "Header 2X1" 634.45,226.964 r0 top
J2 "Header2X1" "Header 2X1" 556.14,226.964 r0 top
J2 "Header2X1" "Header 2X1" 516.986,226.964 r0 top
J2 "Header2X1" "Header 2X1" 673.604,226.964 r0 top
J2 "Header2X1" "Header 2X1" 673.604,176.125 r0 top
J2 "Header2X1" "Header 2X1" 516.986,176.125 r0 top
J2 "Header2X1" "Header 2X1" 556.14,176.125 r0 top
J2 "Header2X1" "Header 2X1" 634.45,176.125 r0 top
J2 "Header2X1" "Header 2X1" 595.295,176.125 r0 top
J3 "Header3X1" "HEADER 3X1"#2 572.816,348.238 r0 top
J3 "Header3X1" "HEADER 3X1"#2 611.971,348.238 r0 top
J3 "Header3X1" "HEADER 3X1"#2 533.661,348.238 r0 top
J3 "Header3X1" "HEADER 3X1"#2 494.507,348.238 r0 top
J3 "Header3X1" "HEADER 3X1"#2 651.125,348.238 r0 top
J3 "Header3X1" "HEADER 3X1"#2 572.816,297.399 r0 top
J3 "Header3X1" "HEADER 3X1"#2 611.971,297.399 r0 top
J3 "Header3X1" "HEADER 3X1"#2 533.661,297.399 r0 top
J3 "Header3X1" "HEADER 3X1"#2 494.507,297.399 r0 top
J3 "Header3X1" "HEADER 3X1"#2 651.125,297.399 r0 top
J3 "Header3X1" "HEADER 3X1"#2 572.816,246.561 r0 top
J3 "Header3X1" "HEADER 3X1"#2 611.971,246.561 r0 top
J3 "Header3X1" "HEADER 3X1"#2 533.661,246.561 r0 top
J3 "Header3X1" "HEADER 3X1"#2 494.507,246.561 r0 top
J3 "Header3X1" "HEADER 3X1"#2 651.125,246.561 r0 top
J3 "Header3X1" "HEADER 3X1"#2 572.816,94.045 r0 top
J3 "Header3X1" "HEADER 3X1"#2 611.971,94.045 r0 top
J3 "Header3X1" "HEADER 3X1"#2 533.661,94.045 r0 top
J3 "Header3X1" "HEADER 3X1"#2 494.507,94.045 r0 top
J3 "Header3X1" "HEADER 3X1"#2 651.125,94.045 r0 top
J3 "Header3X1" "HEADER 3X1"#2 572.816,195.722 r0 top
J3 "Header3X1" "HEADER 3X1"#2 611.971,195.722 r0 top
J3 "Header3X1" "HEADER 3X1"#2 533.661,195.722 r0 top
J3 "Header3X1" "HEADER 3X1"#2 494.507,195.722 r0 top
J3 "Header3X1" "HEADER 3X1"#2 651.125,195.722 r0 top
J3 "Header3X1" "HEADER 3X1"#2 651.125,144.883 r0 top
J3 "Header3X1" "HEADER 3X1"#2 494.507,144.883 r0 top
J3 "Header3X1" "HEADER 3X1"#2 533.661,144.883 r0 top
J3 "Header3X1" "HEADER 3X1"#2 611.971,144.883 r0 top
J3 "Header3X1" "HEADER 3X1"#2 572.816,144.883 r0 top
Q1 "QNPN" SOT-23B_L 585.77,352.81 r90 top
Q1 "QNPN" SOT-23B_L 624.925,352.81 r90 top
Q1 "QNPN" SOT-23B_L 546.615,352.81 r90 top
Q1 "QNPN" SOT-23B_L 507.461,352.81 r90 top
Q1 "QNPN" SOT-23B_L 664.079,352.81 r90 top
Q1 "QNPN" SOT-23B_L 585.77,301.971 r90 top
Q1 "QNPN" SOT-23B_L 624.925,301.971 r90 top
Q1 "QNPN" SOT-23B_L 546.615,301.971 r90 top
Q1 "QNPN" SOT-23B_L 507.461,301.971 r90 top
Q1 "QNPN" SOT-23B_L 664.079,301.971 r90 top
Q1 "QNPN" SOT-23B_L 585.77,251.133 r90 top
Q1 "QNPN" SOT-23B_L 624.925,251.133 r90 top
Q1 "QNPN" SOT-23B_L 546.615,251.133 r90 top
Q1 "QNPN" SOT-23B_L 507.461,251.133 r90 top
Q1 "QNPN" SOT-23B_L 664.079,251.133 r90 top
Q1 "QNPN" SOT-23B_L 585.77,98.617 r90 top
Q1 "QNPN" SOT-23B_L 624.925,98.617 r90 top
Q1 "QNPN" SOT-23B_L 546.615,98.617 r90 top
Q1 "QNPN" SOT-23B_L 507.461,98.617 r90 top
Q1 "QNPN" SOT-23B_L 664.079,98.617 r90 top
Q1 "QNPN" SOT-23B_L 585.77,200.294 r90 top
Q1 "QNPN" SOT-23B_L 624.925,200.294 r90 top
Q1 "QNPN" SOT-23B_L 546.615,200.294 r90 top
Q1 "QNPN" SOT-23B_L 507.461,200.294 r90 top
Q1 "QNPN" SOT-23B_L 664.079,200.294 r90 top
Q1 "QNPN" SOT-23B_L 664.079,149.455 r90 top
Q1 "QNPN" SOT-23B_L 507.461,149.455 r90 top
Q1 "QNPN" SOT-23B_L 546.615,149.455 r90 top
Q1 "QNPN" SOT-23B_L 624.925,149.455 r90 top
Q1 "QNPN" SOT-23B_L 585.77,149.455 r90 top
R1 "10K" "RES 1206 (3216X08L)"#1 591.231,342.269 r90 top
R1 "10K" "RES 1206 (3216X08L)"#1 630.386,342.269 r90 top
R1 "10K" "RES 1206 (3216X08L)"#1 552.076,342.269 r90 top
R1 "10K" "RES 1206 (3216X08L)"#1 512.922,342.269 r90 top
R1 "10K" "RES 1206 (3216X08L)"#1 669.54,342.269 r90 top
R1 "10K" "RES 1206 (3216X08L)"#1 591.231,291.43 r90 top
R1 "10K" "RES 1206 (3216X08L)"#1 630.386,291.43 r90 top
R1 "10K" "RES 1206 (3216X08L)"#1 552.076,291.43 r90 top
R1 "10K" "RES 1206 (3216X08L)"#1 512.922,291.43 r90 top
R1 "10K" "RES 1206 (3216X08L)"#1 669.54,291.43 r90 top
R1 "10K" "RES 1206 (3216X08L)"#1 591.231,240.592 r90 top
R1 "10K" "RES 1206 (3216X08L)"#1 630.386,240.592 r90 top
R1 "10K" "RES 1206 (3216X08L)"#1 552.076,240.592 r90 top
R1 "10K" "RES 1206 (3216X08L)"#1 512.922,240.592 r90 top
R1 "10K" "RES 1206 (3216X08L)"#1 669.54,240.592 r90 top
R1 "10K" "RES 1206 (3216X08L)"#1 591.231,88.076 r90 top
R1 "10K" "RES 1206 (3216X08L)"#1 630.386,88.076 r90 top
R1 "10K" "RES 1206 (3216X08L)"#1 552.076,88.076 r90 top
R1 "10K" "RES 1206 (3216X08L)"#1 512.922,88.076 r90 top
R1 "10K" "RES 1206 (3216X08L)"#1 669.54,88.076 r90 top
R1 "10K" "RES 1206 (3216X08L)"#1 591.231,189.753 r90 top
R1 "10K" "RES 1206 (3216X08L)"#1 630.386,189.753 r90 top
R1 "10K" "RES 1206 (3216X08L)"#1 552.076,189.753 r90 top
R1 "10K" "RES 1206 (3216X08L)"#1 512.922,189.753 r90 top
R1 "10K" "RES 1206 (3216X08L)"#1 669.54,189.753 r90 top
R1 "10K" "RES 1206 (3216X08L)"#1 669.54,138.914 r90 top
R1 "10K" "RES 1206 (3216X08L)"#1 512.922,138.914 r90 top
R1 "10K" "RES 1206 (3216X08L)"#1 552.076,138.914 r90 top
R1 "10K" "RES 1206 (3216X08L)"#1 630.386,138.914 r90 top
R1 "10K" "RES 1206 (3216X08L)"#1 591.231,138.914 r90 top
R2 "10K" "RES 1206 (3216X08L)"#2 579.928,370.463 r270 top
R2 "10K" "RES 1206 (3216X08L)"#2 619.083,370.463 r270 top
R2 "10K" "RES 1206 (3216X08L)"#2 540.773,370.463 r270 top
R2 "10K" "RES 1206 (3216X08L)"#2 501.619,370.463 r270 top
R2 "10K" "RES 1206 (3216X08L)"#2 658.237,370.463 r270 top
R2 "10K" "RES 1206 (3216X08L)"#2 579.928,319.624 r270 top
R2 "10K" "RES 1206 (3216X08L)"#2 619.083,319.624 r270 top
R2 "10K" "RES 1206 (3216X08L)"#2 540.773,319.624 r270 top
R2 "10K" "RES 1206 (3216X08L)"#2 501.619,319.624 r270 top
R2 "10K" "RES 1206 (3216X08L)"#2 658.237,319.624 r270 top
R2 "10K" "RES 1206 (3216X08L)"#2 579.928,268.786 r270 top
R2 "10K" "RES 1206 (3216X08L)"#2 619.083,268.786 r270 top
R2 "10K" "RES 1206 (3216X08L)"#2 540.773,268.786 r270 top
R2 "10K" "RES 1206 (3216X08L)"#2 501.619,268.786 r270 top
R2 "10K" "RES 1206 (3216X08L)"#2 658.237,268.786 r270 top
R2 "10K" "RES 1206 (3216X08L)"#2 579.928,116.27 r270 top
R2 "10K" "RES 1206 (3216X08L)"#2 619.083,116.27 r270 top
R2 "10K" "RES 1206 (3216X08L)"#2 540.773,116.27 r270 top
R2 "10K" "RES 1206 (3216X08L)"#2 501.619,116.27 r270 top
R2 "10K" "RES 1206 (3216X08L)"#2 658.237,116.27 r270 top
R2 "10K" "RES 1206 (3216X08L)"#2 579.928,217.947 r270 top
R2 "10K" "RES 1206 (3216X08L)"#2 619.083,217.947 r270 top
R2 "10K" "RES 1206 (3216X08L)"#2 540.773,217.947 r270 top
R2 "10K" "RES 1206 (3216X08L)"#2 501.619,217.947 r270 top
R2 "10K" "RES 1206 (3216X08L)"#2 658.237,217.947 r270 top
R2 "10K" "RES 1206 (3216X08L)"#2 658.237,167.108 r270 top
R2 "10K" "RES 1206 (3216X08L)"#2 501.619,167.108 r270 top
R2 "10K" "RES 1206 (3216X08L)"#2 540.773,167.108 r270 top
R2 "10K" "RES 1206 (3216X08L)"#2 619.083,167.108 r270 top
R2 "10K" "RES 1206 (3216X08L)"#2 579.928,167.108 r270 top
R3 "10K" Res-(2/1) 571.8,377.067 r270 top
R3 "10K" Res-(2/1) 610.955,377.067 r270 top
R3 "10K" Res-(2/1) 532.645,377.067 r270 top
R3 "10K" Res-(2/1) 493.491,377.067 r270 top
R3 "10K" Res-(2/1) 650.109,377.067 r270 top
R3 "10K" Res-(2/1) 571.8,326.228 r270 top
R3 "10K" Res-(2/1) 610.955,326.228 r270 top
R3 "10K" Res-(2/1) 532.645,326.228 r270 top
R3 "10K" Res-(2/1) 493.491,326.228 r270 top
R3 "10K" Res-(2/1) 650.109,326.228 r270 top
R3 "10K" Res-(2/1) 571.8,275.39 r270 top
R3 "10K" Res-(2/1) 610.955,275.39 r270 top
R3 "10K" Res-(2/1) 532.645,275.39 r270 top
R3 "10K" Res-(2/1) 493.491,275.39 r270 top
R3 "10K" Res-(2/1) 650.109,275.39 r270 top
R3 "10K" Res-(2/1) 571.8,122.874 r270 top
R3 "10K" Res-(2/1) 610.955,122.874 r270 top
R3 "10K" Res-(2/1) 532.645,122.874 r270 top
R3 "10K" Res-(2/1) 493.491,122.874 r270 top
R3 "10K" Res-(2/1) 650.109,122.874 r270 top
R3 "10K" Res-(2/1) 571.8,224.551 r270 top
R3 "10K" Res-(2/1) 610.955,224.551 r270 top
R3 "10K" Res-(2/1) 532.645,224.551 r270 top
R3 "10K" Res-(2/1) 493.491,224.551 r270 top
R3 "10K" Res-(2/1) 650.109,224.551 r270 top
R3 "10K" Res-(2/1) 650.109,173.712 r270 top
R3 "10K" Res-(2/1) 493.491,173.712 r270 top
R3 "10K" Res-(2/1) 532.645,173.712 r270 top
R3 "10K" Res-(2/1) 610.955,173.712 r270 top
R3 "10K" Res-(2/1) 571.8,173.712 r270 top
R6 "10K" "RES 1206 (3216X08L)"#3 593.136,361.7 r270 top
R6 "10K" "RES 1206 (3216X08L)"#3 632.291,361.7 r270 top
R6 "10K" "RES 1206 (3216X08L)"#3 553.981,361.7 r270 top
R6 "10K" "RES 1206 (3216X08L)"#3 514.827,361.7 r270 top
R6 "10K" "RES 1206 (3216X08L)"#3 671.445,361.7 r270 top
R6 "10K" "RES 1206 (3216X08L)"#3 593.136,310.861 r270 top
R6 "10K" "RES 1206 (3216X08L)"#3 632.291,310.861 r270 top
R6 "10K" "RES 1206 (3216X08L)"#3 553.981,310.861 r270 top
R6 "10K" "RES 1206 (3216X08L)"#3 514.827,310.861 r270 top
R6 "10K" "RES 1206 (3216X08L)"#3 671.445,310.861 r270 top
R6 "10K" "RES 1206 (3216X08L)"#3 593.136,260.023 r270 top
R6 "10K" "RES 1206 (3216X08L)"#3 632.291,260.023 r270 top
R6 "10K" "RES 1206 (3216X08L)"#3 553.981,260.023 r270 top
R6 "10K" "RES 1206 (3216X08L)"#3 514.827,260.023 r270 top
R6 "10K" "RES 1206 (3216X08L)"#3 671.445,260.023 r270 top
R6 "10K" "RES 1206 (3216X08L)"#3 593.136,107.507 r270 top
R6 "10K" "RES 1206 (3216X08L)"#3 632.291,107.507 r270 top
R6 "10K" "RES 1206 (3216X08L)"#3 553.981,107.507 r270 top
R6 "10K" "RES 1206 (3216X08L)"#3 514.827,107.507 r270 top
R6 "10K" "RES 1206 (3216X08L)"#3 671.445,107.507 r270 top
R6 "10K" "RES 1206 (3216X08L)"#3 593.136,209.184 r270 top
R6 "10K" "RES 1206 (3216X08L)"#3 632.291,209.184 r270 top
R6 "10K" "RES 1206 (3216X08L)"#3 553.981,209.184 r270 top
R6 "10K" "RES 1206 (3216X08L)"#3 514.827,209.184 r270 top
R6 "10K" "RES 1206 (3216X08L)"#3 671.445,209.184 r270 top
R6 "10K" "RES 1206 (3216X08L)"#3 671.445,158.345 r270 top
R6 "10K" "RES 1206 (3216X08L)"#3 514.827,158.345 r270 top
R6 "10K" "RES 1206 (3216X08L)"#3 553.981,158.345 r270 top
R6 "10K" "RES 1206 (3216X08L)"#3 632.291,158.345 r270 top
R6 "10K" "RES 1206 (3216X08L)"#3 593.136,158.345 r270 top
R7 "10K" "RES 1206 (3216X08L)"#4 577.896,353.953 r90 top
R7 "10K" "RES 1206 (3216X08L)"#4 617.051,353.953 r90 top
R7 "10K" "RES 1206 (3216X08L)"#4 538.741,353.953 r90 top
R7 "10K" "RES 1206 (3216X08L)"#4 499.587,353.953 r90 top
R7 "10K" "RES 1206 (3216X08L)"#4 656.205,353.953 r90 top
R7 "10K" "RES 1206 (3216X08L)"#4 577.896,303.114 r90 top
R7 "10K" "RES 1206 (3216X08L)"#4 617.051,303.114 r90 top
R7 "10K" "RES 1206 (3216X08L)"#4 538.741,303.114 r90 top
R7 "10K" "RES 1206 (3216X08L)"#4 499.587,303.114 r90 top
R7 "10K" "RES 1206 (3216X08L)"#4 656.205,303.114 r90 top
R7 "10K" "RES 1206 (3216X08L)"#4 577.896,252.276 r90 top
R7 "10K" "RES 1206 (3216X08L)"#4 617.051,252.276 r90 top
R7 "10K" "RES 1206 (3216X08L)"#4 538.741,252.276 r90 top
R7 "10K" "RES 1206 (3216X08L)"#4 499.587,252.276 r90 top
R7 "10K" "RES 1206 (3216X08L)"#4 656.205,252.276 r90 top
R7 "10K" "RES 1206 (3216X08L)"#4 577.896,99.76 r90 top
R7 "10K" "RES 1206 (3216X08L)"#4 617.051,99.76 r90 top
R7 "10K" "RES 1206 (3216X08L)"#4 538.741,99.76 r90 top
R7 "10K" "RES 1206 (3216X08L)"#4 499.587,99.76 r90 top
R7 "10K" "RES 1206 (3216X08L)"#4 656.205,99.76 r90 top
R7 "10K" "RES 1206 (3216X08L)"#4 577.896,201.437 r90 top
R7 "10K" "RES 1206 (3216X08L)"#4 617.051,201.437 r90 top
R7 "10K" "RES 1206 (3216X08L)"#4 538.741,201.437 r90 top
R7 "10K" "RES 1206 (3216X08L)"#4 499.587,201.437 r90 top
R7 "10K" "RES 1206 (3216X08L)"#4 656.205,201.437 r90 top
R7 "10K" "RES 1206 (3216X08L)"#4 656.205,150.598 r90 top
R7 "10K" "RES 1206 (3216X08L)"#4 499.587,150.598 r90 top
R7 "10K" "RES 1206 (3216X08L)"#4 538.741,150.598 r90 top
R7 "10K" "RES 1206 (3216X08L)"#4 617.051,150.598 r90 top
R7 "10K" "RES 1206 (3216X08L)"#4 577.896,150.598 r90 top
R8 "10K" "RES 1206 (3216X08L)"#4 582.142,353.917 r270 top
R8 "10K" "RES 1206 (3216X08L)"#4 621.297,353.917 r270 top
R8 "10K" "RES 1206 (3216X08L)"#4 542.988,353.917 r270 top
R8 "10K" "RES 1206 (3216X08L)"#4 503.833,353.917 r270 top
R8 "10K" "RES 1206 (3216X08L)"#4 660.451,353.917 r270 top
R8 "10K" "RES 1206 (3216X08L)"#4 582.142,303.078 r270 top
R8 "10K" "RES 1206 (3216X08L)"#4 621.297,303.078 r270 top
R8 "10K" "RES 1206 (3216X08L)"#4 542.988,303.078 r270 top
R8 "10K" "RES 1206 (3216X08L)"#4 503.833,303.078 r270 top
R8 "10K" "RES 1206 (3216X08L)"#4 660.452,303.078 r270 top
R8 "10K" "RES 1206 (3216X08L)"#4 582.142,252.239 r270 top
R8 "10K" "RES 1206 (3216X08L)"#4 621.297,252.239 r270 top
R8 "10K" "RES 1206 (3216X08L)"#4 542.988,252.239 r270 top
R8 "10K" "RES 1206 (3216X08L)"#4 503.833,252.239 r270 top
R8 "10K" "RES 1206 (3216X08L)"#4 660.452,252.239 r270 top
R8 "10K" "RES 1206 (3216X08L)"#4 582.142,99.723 r270 top
R8 "10K" "RES 1206 (3216X08L)"#4 621.297,99.723 r270 top
R8 "10K" "RES 1206 (3216X08L)"#4 542.988,99.723 r270 top
R8 "10K" "RES 1206 (3216X08L)"#4 503.833,99.723 r270 top
R8 "10K" "RES 1206 (3216X08L)"#4 660.452,99.723 r270 top
R8 "10K" "RES 1206 (3216X08L)"#4 582.142,201.401 r270 top
R8 "10K" "RES 1206 (3216X08L)"#4 621.297,201.401 r270 top
R8 "10K" "RES 1206 (3216X08L)"#4 542.988,201.401 r270 top
R8 "10K" "RES 1206 (3216X08L)"#4 503.833,201.401 r270 top
R8 "10K" "RES 1206 (3216X08L)"#4 660.452,201.401 r270 top
R8 "10K" "RES 1206 (3216X08L)"#4 660.452,150.562 r270 top
R8 "10K" "RES 1206 (3216X08L)"#4 503.833,150.562 r270 top
R8 "10K" "RES 1206 (3216X08L)"#4 542.988,150.562 r270 top
R8 "10K" "RES 1206 (3216X08L)"#4 621.297,150.562 r270 top
R8 "10K" "RES 1206 (3216X08L)"#4 582.142,150.562 r270 top
R9 "10K" "RES 1206 (3216X08L)"#3 596.565,361.7 r270 top
R9 "10K" "RES 1206 (3216X08L)"#3 635.72,361.7 r270 top
R9 "10K" "RES 1206 (3216X08L)"#3 557.41,361.7 r270 top
R9 "10K" "RES 1206 (3216X08L)"#3 518.256,361.7 r270 top
R9 "10K" "RES 1206 (3216X08L)"#3 674.874,361.7 r270 top
R9 "10K" "RES 1206 (3216X08L)"#3 596.565,310.861 r270 top
R9 "10K" "RES 1206 (3216X08L)"#3 635.72,310.861 r270 top
R9 "10K" "RES 1206 (3216X08L)"#3 557.41,310.861 r270 top
R9 "10K" "RES 1206 (3216X08L)"#3 518.256,310.861 r270 top
R9 "10K" "RES 1206 (3216X08L)"#3 674.874,310.861 r270 top
R9 "10K" "RES 1206 (3216X08L)"#3 596.565,260.023 r270 top
R9 "10K" "RES 1206 (3216X08L)"#3 635.72,260.023 r270 top
R9 "10K" "RES 1206 (3216X08L)"#3 557.41,260.023 r270 top
R9 "10K" "RES 1206 (3216X08L)"#3 518.256,260.023 r270 top
R9 "10K" "RES 1206 (3216X08L)"#3 674.874,260.023 r270 top
R9 "10K" "RES 1206 (3216X08L)"#3 596.565,107.507 r270 top
R9 "10K" "RES 1206 (3216X08L)"#3 635.72,107.507 r270 top
R9 "10K" "RES 1206 (3216X08L)"#3 557.41,107.507 r270 top
R9 "10K" "RES 1206 (3216X08L)"#3 518.256,107.507 r270 top
R9 "10K" "RES 1206 (3216X08L)"#3 674.874,107.507 r270 top
R9 "10K" "RES 1206 (3216X08L)"#3 596.565,209.184 r270 top
R9 "10K" "RES 1206 (3216X08L)"#3 635.72,209.184 r270 top
R9 "10K" "RES 1206 (3216X08L)"#3 557.41,209.184 r270 top
R9 "10K" "RES 1206 (3216X08L)"#3 518.256,209.184 r270 top
R9 "10K" "RES 1206 (3216X08L)"#3 674.874,209.184 r270 top
R9 "10K" "RES 1206 (3216X08L)"#3 674.874,158.345 r270 top
R9 "10K" "RES 1206 (3216X08L)"#3 518.256,158.345 r270 top
R9 "10K" "RES 1206 (3216X08L)"#3 557.41,158.345 r270 top
R9 "10K" "RES 1206 (3216X08L)"#3 635.72,158.345 r270 top
R9 "10K" "RES 1206 (3216X08L)"#3 596.565,158.345 r270 top
U1 "ATtiny15L-1SC" 8S2_N 595.168,354.207 r0 top
U1 "ATtiny15L-1SC" 8S2_N 634.323,354.207 r0 top
U1 "ATtiny15L-1SC" 8S2_N 556.013,354.207 r0 top
U1 "ATtiny15L-1SC" 8S2_N 516.859,354.207 r0 top
U1 "ATtiny15L-1SC" 8S2_N 673.477,354.207 r0 top
U1 "ATtiny15L-1SC" 8S2_N 595.168,303.368 r0 top
U1 "ATtiny15L-1SC" 8S2_N 634.323,303.368 r0 top
U1 "ATtiny15L-1SC" 8S2_N 556.013,303.368 r0 top
U1 "ATtiny15L-1SC" 8S2_N 516.859,303.368 r0 top
U1 "ATtiny15L-1SC" 8S2_N 673.477,303.368 r0 top
U1 "ATtiny15L-1SC" 8S2_N 595.168,252.53 r0 top
U1 "ATtiny15L-1SC" 8S2_N 634.323,252.53 r0 top
U1 "ATtiny15L-1SC" 8S2_N 556.013,252.53 r0 top
U1 "ATtiny15L-1SC" 8S2_N 516.859,252.53 r0 top
U1 "ATtiny15L-1SC" 8S2_N 673.477,252.53 r0 top
U1 "ATtiny15L-1SC" 8S2_N 595.168,100.014 r0 top
U1 "ATtiny15L-1SC" 8S2_N 634.323,100.014 r0 top
U1 "ATtiny15L-1SC" 8S2_N 556.013,100.014 r0 top
U1 "ATtiny15L-1SC" 8S2_N 516.859,100.014 r0 top
U1 "ATtiny15L-1SC" 8S2_N 673.477,100.014 r0 top
U1 "ATtiny15L-1SC" 8S2_N 595.168,201.691 r0 top
U1 "ATtiny15L-1SC" 8S2_N 634.323,201.691 r0 top
U1 "ATtiny15L-1SC" 8S2_N 556.013,201.691 r0 top
U1 "ATtiny15L-1SC" 8S2_N 516.859,201.691 r0 top
U1 "ATtiny15L-1SC" 8S2_N 673.477,201.691 r0 top
U1 "ATtiny15L-1SC" 8S2_N 673.477,150.852 r0 top
U1 "ATtiny15L-1SC" 8S2_N 516.859,150.852 r0 top
U1 "ATtiny15L-1SC" 8S2_N 556.013,150.852 r0 top
U1 "ATtiny15L-1SC" 8S2_N 634.323,150.852 r0 top
U1 "ATtiny15L-1SC" 8S2_N 595.168,150.852 r0 top
U2 "K3021P" DIP762W50P254L730H410Q6 585.897,371.064 r90 top
U2 "K3021P" DIP762W50P254L730H410Q6 625.052,371.064 r90 top
U2 "K3021P" DIP762W50P254L730H410Q6 546.742,371.064 r90 top
U2 "K3021P" DIP762W50P254L730H410Q6 507.588,371.064 r90 top
U2 "K3021P" DIP762W50P254L730H410Q6 664.206,371.064 r90 top
U2 "K3021P" DIP762W50P254L730H410Q6 585.897,320.225 r90 top
U2 "K3021P" DIP762W50P254L730H410Q6 625.052,320.225 r90 top
U2 "K3021P" DIP762W50P254L730H410Q6 546.742,320.225 r90 top
U2 "K3021P" DIP762W50P254L730H410Q6 507.588,320.225 r90 top
U2 "K3021P" DIP762W50P254L730H410Q6 664.206,320.225 r90 top
U2 "K3021P" DIP762W50P254L730H410Q6 585.897,269.387 r90 top
U2 "K3021P" DIP762W50P254L730H410Q6 625.052,269.387 r90 top
U2 "K3021P" DIP762W50P254L730H410Q6 546.742,269.387 r90 top
U2 "K3021P" DIP762W50P254L730H410Q6 507.588,269.387 r90 top
U2 "K3021P" DIP762W50P254L730H410Q6 664.206,269.387 r90 top
U2 "K3021P" DIP762W50P254L730H410Q6 585.897,116.871 r90 top
U2 "K3021P" DIP762W50P254L730H410Q6 625.052,116.871 r90 top
U2 "K3021P" DIP762W50P254L730H410Q6 546.742,116.871 r90 top
U2 "K3021P" DIP762W50P254L730H410Q6 507.588,116.871 r90 top
U2 "K3021P" DIP762W50P254L730H410Q6 664.206,116.871 r90 top
U2 "K3021P" DIP762W50P254L730H410Q6 585.897,218.548 r90 top
U2 "K3021P" DIP762W50P254L730H410Q6 625.052,218.548 r90 top
U2 "K3021P" DIP762W50P254L730H410Q6 546.742,218.548 r90 top
U2 "K3021P" DIP762W50P254L730H410Q6 507.588,218.548 r90 top
U2 "K3021P" DIP762W50P254L730H410Q6 664.206,218.548 r90 top
U2 "K3021P" DIP762W50P254L730H410Q6 664.206,167.709 r90 top
U2 "K3021P" DIP762W50P254L730H410Q6 507.588,167.709 r90 top
U2 "K3021P" DIP762W50P254L730H410Q6 546.742,167.709 r90 top
U2 "K3021P" DIP762W50P254L730H410Q6 625.052,167.709 r90 top
U2 "K3021P" DIP762W50P254L730H410Q6 585.897,167.709 r90 top
U3 "MB6S" SOIC245P670X270-4N 595.422,373.13 r270 top
U3 "MB6S" SOIC245P670X270-4N 634.577,373.13 r270 top
U3 "MB6S" SOIC245P670X270-4N 556.267,373.13 r270 top
U3 "MB6S" SOIC245P670X270-4N 517.113,373.13 r270 top
U3 "MB6S" SOIC245P670X270-4N 673.731,373.13 r270 top
U3 "MB6S" SOIC245P670X270-4N 595.422,322.291 r270 top
U3 "MB6S" SOIC245P670X270-4N 634.577,322.291 r270 top
U3 "MB6S" SOIC245P670X270-4N 556.267,322.291 r270 top
U3 "MB6S" SOIC245P670X270-4N 517.113,322.291 r270 top
U3 "MB6S" SOIC245P670X270-4N 673.731,322.291 r270 top
U3 "MB6S" SOIC245P670X270-4N 595.422,271.453 r270 top
U3 "MB6S" SOIC245P670X270-4N 634.577,271.453 r270 top
U3 "MB6S" SOIC245P670X270-4N 556.267,271.453 r270 top
U3 "MB6S" SOIC245P670X270-4N 517.113,271.453 r270 top
U3 "MB6S" SOIC245P670X270-4N 673.731,271.453 r270 top
U3 "MB6S" SOIC245P670X270-4N 595.422,118.937 r270 top
U3 "MB6S" SOIC245P670X270-4N 634.577,118.937 r270 top
U3 "MB6S" SOIC245P670X270-4N 556.267,118.937 r270 top
U3 "MB6S" SOIC245P670X270-4N 517.113,118.937 r270 top
U3 "MB6S" SOIC245P670X270-4N 673.731,118.937 r270 top
U3 "MB6S" SOIC245P670X270-4N 595.422,220.614 r270 top
U3 "MB6S" SOIC245P670X270-4N 634.577,220.614 r270 top
U3 "MB6S" SOIC245P670X270-4N 556.267,220.614 r270 top
U3 "MB6S" SOIC245P670X270-4N 517.113,220.614 r270 top
U3 "MB6S" SOIC245P670X270-4N 673.731,220.614 r270 top
U3 "MB6S" SOIC245P670X270-4N 673.731,169.775 r270 top
U3 "MB6S" SOIC245P670X270-4N 517.113,169.775 r270 top
U3 "MB6S" SOIC245P670X270-4N 556.267,169.775 r270 top
U3 "MB6S" SOIC245P670X270-4N 634.577,169.775 r270 top
U3 "MB6S" SOIC245P670X270-4N 595.422,169.775 r270 top

## Footprints (in the part's own frame and the unit in brackets; to place one, negate y for a bottom-side part, rotate by r counter-clockwise, add the part's x,y. Pads: shape width x height; smd on the part's side, far side on the other; paste and mask are expansions set on the pad)
"1uf 400v" [mm] "24*9mm"
  rrect50% 2.8x3 hole 0.9: 1(0.601,4.572) 2(23.601,4.572)
  silkscreen extent 0.63,0 24,9
3.2X1.6X1.1#1 [mm] "SMT LED; 2 Flat Leads"
  rect 2x1.5 smd: 1(-1.75,0) 2(1.75,0)
  silkscreen extent -2.9,-1.15 3.2,1.15
3.2X1.6X1.1#2 [mm] "SMT LED; 2 Flat Leads"
  rect 2x1.8 smd: 1(-2.296,0) 2(2.504,0)
  silkscreen extent -2.9,-1.15 3.2,1.15
3.2X1.6X1.1#3 [mm] "SMT LED; 2 Flat Leads"
  rect 1.5x1.5 smd: 1(-1.75,0) 2(1.75,0)
  silkscreen extent -2.9,-1.15 3.2,1.15
3.2X1.6X1.1#4 [mm] "SMT LED; 2 Flat Leads"
  rect 2x4 smd: 1(-3.429,0) 2(3.302,0)
  silkscreen extent -2.9,-1.15 3.2,1.15
8S2_N [mm] "SOP, 8-Leads, Body 5.3x5.3mm, Pitch 1.27mm, IPC Medium Density"
  oval 2.2x0.6 smd: 1(-3.4,1.905) 2(-3.4,0.635) 3(-3.4,-0.635) 4(-3.4,-1.905) 5(3.4,-1.905) 6(3.4,-0.635) 7(3.4,0.635) 8(3.4,1.905)
  silkscreen extent -3.52,-2.75 1.9,2.88, body extent -2.73,-2.75 2.73,2.75, height 2.16
"CAP 1206"#1 [mm]
  rect 1.05x1.7 smd: 1(-1.533,0) 2(1.517,0)
  silkscreen extent -0.47,-0.75 0.53,0.75, body extent -1.49,-0.77 1.55,0.75, height 0.75
"CAP 1206"#2 [mm]
  rect 1.05x1.7 smd: 1(-1.461,0) 2(1.589,0)
  silkscreen extent -0.47,-0.75 0.53,0.75, body extent -1.49,-0.77 1.55,0.75, height 0.75
DIP762W50P254L730H410Q6 [mm]
  rrect50% 2.5x1.4 smd: 1(-4.302,2.54) 2(-4.302,0) 3(-4.302,-2.54) 4(4.098,-2.54) 5(4.098,0) 6(4.098,2.54)
  silkscreen extent -3.9,-3.65 2.8,3.9
"Header 2X1" [mm]
  rrect50% 1.7x3 hole 0.9: 1(-1.27,0) 2(1.27,0)
  silkscreen extent -2.67,-1.4 2.67,1.4, body extent -2.54,-1.27 2.54,1.27, height 9.5
"HEADER 3X1"#1 [mm]
  rrect50% 1.8x3 hole 0.9: 1(0,0) 3(5.08,0)
  round 1 hole 0.9: 2(2.54,0)
  silkscreen extent -1.4,-1.4 6.48,1.4, body extent -1.24,-1.27 6.38,1.27, height 8.38
"HEADER 3X1"#2 [mm]
  rrect50% 1.778x3 hole 0.7: 1(0,0) 2(2.54,0) 3(5.08,0)
  silkscreen extent -1.4,-1.4 6.48,1.4, body extent -1.24,-1.27 6.38,1.27, height 8.38
PAD [mm]
  Top Layer circle w1: c0,-5.08 r0.75
  Bottom Layer circle w1: c0,0 r0.75
"RES 1206 (3216X08L)"#1 [mm] "Chip Resistor, 2-Leads, Body 3.2x1.6mm, IPC High Density _ (0.125 W)"
  rect 1.05x1.7 smd: 1(-1.691,0) 2(1.359,0)
  silkscreen extent -0.5,-0.75 0.5,0.75, body extent -1.52,-0.76 1.53,0.76, height 0.6
"RES 1206 (3216X08L)"#2 [mm] "Chip Resistor, 2-Leads, Body 3.2x1.6mm, IPC High Density _ (0.125 W)"
  rect 1.05x1.7 smd: 1(-1.533,0) 2(1.905,0)
  silkscreen extent -0.5,-0.75 0.5,0.75, body extent -1.52,-0.76 1.53,0.76, height 0.6
"RES 1206 (3216X08L)"#3 [mm] "Chip Resistor, 2-Leads, Body 3.2x1.6mm, IPC High Density _ (0.125 W)"
  rect 1.05x1.7 smd: 1(-1.486,0) 2(1.564,0)
  silkscreen extent -0.5,-0.75 0.5,0.75, body extent -1.52,-0.76 1.53,0.76, height 0.6
"RES 1206 (3216X08L)"#4 [mm] "Chip Resistor, 2-Leads, Body 3.2x1.6mm, IPC High Density _ (0.125 W)"
  rect 1.05x1.7 smd: 1(-1.533,0) 2(1.517,0)
  silkscreen extent -0.5,-0.75 0.5,0.75, body extent -1.52,-0.76 1.53,0.76, height 0.6
Res-(2/1) [mm]
  rrect50% 3x2.3 hole 0.7: 1(2.286,-0.254) 2(16.51,-0.127)
  silkscreen extent 1.2,-2.6 17.4,2.6, body extent 1.28,-1.98 17.32,1.92, height 7.03
SOIC245P670X270-4N [mm]
  rrect23% 1.91x0.91 smd: 1(-2.9,1.225) 2(-2.9,-1.225) 3(2.9,-1.225) 4(2.9,1.225)
  silkscreen extent -4.68,-2.48 2.1,2.48
SOT-23B_L [mm] "SOT23, 3-Leads, Body 2.9x1.3mm, Pitch 0.95mm, Lead Span 2.4mm, IPC High Density"
  rect 0.85x0.6 smd: 1(-1.075,0.95) 2(-1.075,-0.95) 3(1.075,0)
  silkscreen extent -1.2,-1.5 0.7,1.92, body extent -0.7,-1.5 0.7,1.5, height 1.14